# EAGLE board PCB-DISPARRAY4c (EAGLE 7.1.0)
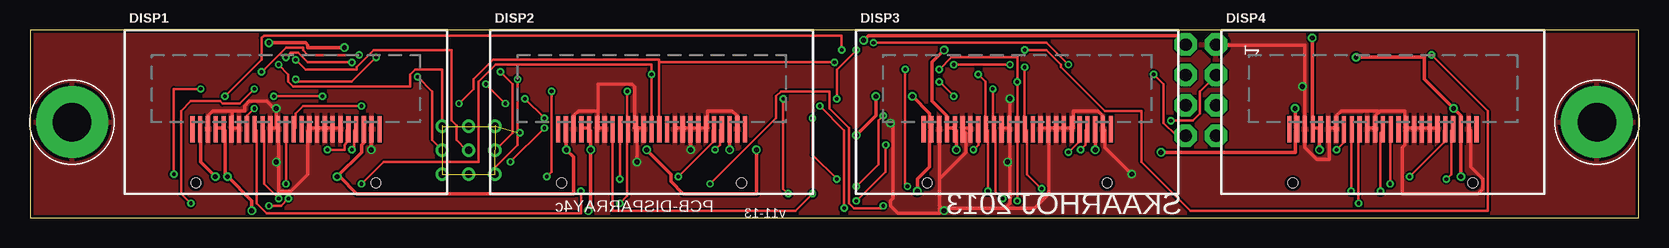
[diagram p0: board, top side]
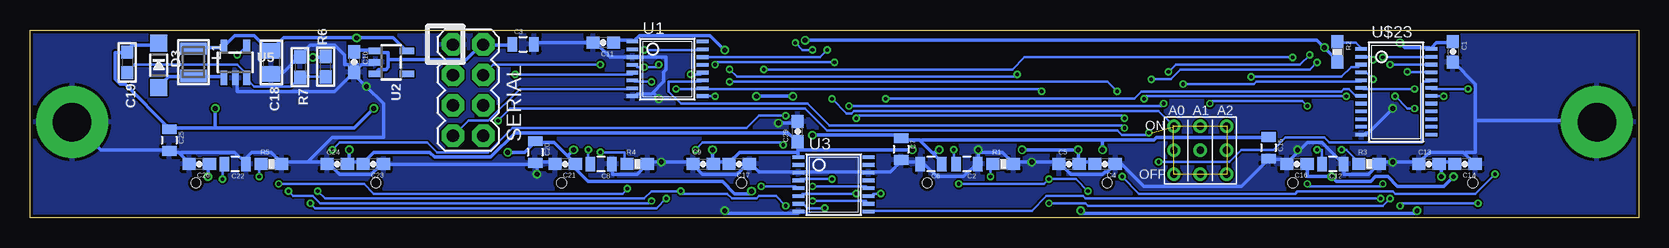
[diagram p1: board, bottom side, seen from below]

Size 134.11 x 15.7 mm. Coordinates in mm from the lower left corner, seen from the top.
Outline: 134.11,0 134.11,15.7 0,15.7 0,0 134.11,0
Copper layers (1*16): Top 0.035mm / dielectric 1.5mm / Bottom 0.035mm
Design rules "Fusion_eagle_rule_v1.1": minimum track width 6mil, minimum drill 12mil, track to track 6mil, track to pad 6mil, pad to pad 6mil, via to via 6mil, smd to smd 0mil, copper to edge 10mil, drill to drill 10mil, minimum pad ring 10mil, minimum via ring 6mil, stop-mask expansion 2mil, vias tented up to drill 100mil, thermal gap 10mil
Net classes: 0 default: width 0.203 mm, drill 0.305 mm, clearance 0.152 mm; 1 Power: width 0.305 mm, drill 0.406 mm, clearance 0.152 mm

## Footprints (pad centres in the part's own frame; a part is rotated, then mirrored left to right if it is on the bottom)
0603-CAP = smd 1.1 x 1: 1 -0.85,0; 2 0.85,0
0805 = smd 0.8 x 1.2: 1 -0.9,0; 2 0.9,0
0805' = smd 1.3 x 1.5: 1 -0.95,0; 2 0.95,0
0603 = smd 1.1 x 1: 1 -0.85,0; 2 0.85,0
SOD-123 = smd 1.4 x 1.4: A 1.85,0; C -1.85,0
ER_OLED0.91-2 = smd 0.35 x 2.2: 1 -7.8,-1.43; 2 -7.15,-1.43; 3 -6.5,-1.43; 4 -5.85,-1.43; 5 -5.2,-1.43; 6 -4.55,-1.43; 7 -3.9,-1.43; 8 -3.25,-1.43; 9 -2.6,-1.43; 10 -1.95,-1.43; 11 -1.3,-1.43; 12 -0.65,-1.43; 13 0,-1.43; 14 0.65,-1.43; 15 1.3,-1.43; 16 1.95,-1.43; 17 2.6,-1.43; 18 3.25,-1.43; 19 3.9,-1.43; 20 4.55,-1.43; 21 5.2,-1.43; 22 5.85,-1.43; 23 6.5,-1.43; 24 7.15,-1.43; 25 7.8,-1.43 | hole 0.8: -7.5,-5.93; 7.5,-5.93
INDUCTOR_1007 = smd 1.016 x 2.2: P$1 -1.127,0; P$2 1.127,0
0603-RES = smd 1.1 x 1: 1 -0.85,0; 2 0.85,0
2X4 = drill 1.016 pad 1.88 octagon: 1 -3.81,-1.27; 2 -3.81,1.27; 3 -1.27,-1.27; 4 -1.27,1.27; 5 1.27,-1.27; 6 1.27,1.27; 7 3.81,-1.27; 8 3.81,1.27
TSSOP16 = smd 0.305 x 0.991: 1 -3.575,-2.918; 2 -2.925,-2.918; 3 -2.275,-2.918; 4 -1.625,-2.918; 5 -0.975,-2.918; 6 -0.325,-2.918; 7 0.325,-2.918; 8 0.975,-2.918; 9 0.975,2.918; 10 0.325,2.918; 11 -0.325,2.918; 12 -0.975,2.918; 13 -1.625,2.918; 14 -2.275,2.918; 15 -2.925,2.918; 16 -3.575,2.918
SOT23-5 = smd 0.55 x 1.2: 1 -0.95,-1.3; 2 0,-1.3; 3 0.95,-1.3; 4 0.95,1.3; 5 -0.95,1.3
3.2MMPAD6MM = drill 3.2 pad 6: P$1 0,0
3BITADDR = drill 0.6: A0 -2.2,0; A1 0,0; A2 2.2,0; H1 -2.2,2; H2 0,2; H3 2.2,2; L1 -2.2,-2; L2 0,-2; L3 2.2,-2
TSSOP24 = smd 0.305 x 0.991: 1 -4.225,-2.918; 2 -3.575,-2.918; 3 -2.925,-2.918; 4 -2.275,-2.918; 5 -1.625,-2.918; 6 -0.975,-2.918; 7 -0.325,-2.918; 8 0.325,-2.918; 9 0.975,-2.918; 10 1.625,-2.918; 11 2.275,-2.918; 12 2.925,-2.918; 13 2.925,2.918; 14 2.275,2.918; 15 1.625,2.918; 16 0.975,2.918; 17 0.325,2.918; 18 -0.325,2.918; 19 -0.975,2.918; 20 -1.625,2.918; 21 -2.275,2.918; 22 -2.925,2.918; 23 -3.575,2.918; 24 -4.225,2.918

## Placement (x,y rotation side)
C1  0.1uF  [0603-CAP]  15.49,13.87 270 bottom
C2  4.7uF/25V  [0805]  56,4.5 180 bottom
C3  10uF  [0805]  93,14.5 0 bottom
C4  100nF  [0603-CAP]  44.5,4.5 180 bottom
C5  4.7uF  [0603-CAP]  47.5,4.5 0 bottom
C6  10uF  [0805]  59,4.5 180 bottom
C7  100nF  [0805]  61.5,5.75 270 bottom
C8  4.7uF/25V  [0805]  86.5,4.5 180 bottom
C9  100nF  [0603-CAP]  78,4.5 0 bottom
C10  2.2uF  [0603-CAP]  107.09,13.02 270 bottom
C11  0.1uF  [0603-CAP]  86.32,14.63 180 bottom
C12  4.7uF/25V  [0805]  25.5,4.5 180 bottom
C13  100nF  [0603-CAP]  17.5,4.5 0 bottom
C14  4.7uF  [0603-CAP]  14.5,4.5 180 bottom
C15  10uF  [0805]  30.87,5.87 270 bottom
C16  100nF  [0603-CAP]  28.5,4.5 180 bottom
C17  4.7uF  [0603-CAP]  75,4.5 180 bottom
C18  10uF  [0805']  114,13 270 bottom
C19  0.1uF  [0603]  126,13 270 bottom
C20  10uF  [0805]  92,5.5 270 bottom
C21  100nF  [0603-CAP]  89.5,4.5 180 bottom
C22  4.7uF/25V  [0805]  117,4.5 180 bottom
C23  100nF  [0603-CAP]  105.5,4.5 180 bottom
C24  4.7uF  [0603-CAP]  108.5,4.5 0 bottom
C25  10uF  [0805]  122.5,6.5 270 bottom
C26  100nF  [0603-CAP]  120,4.5 180 bottom
C29  0.1uF  [0603-CAP]  70.12,7.21 90 bottom
D3  BAT54T1G  [SOD-123]  123.37,12.75 270 bottom
DISP1  [ER_OLED0.91-2]  21.34,8.85 0 top
DISP2  [ER_OLED0.91-2]  51.82,8.85 0 top
DISP3  [ER_OLED0.91-2]  82.3,8.85 0 top
DISP4  [ER_OLED0.91-2]  112.78,8.85 0 top
L1  10uH  [INDUCTOR_1007]  120.5,13 270 bottom
R1  510K  [0603-RES]  53,4.5 0 bottom
R2  10K  [0603-RES]  25.13,13.88 270 bottom
R3  510K  [0603-RES]  22.5,4.5 0 bottom
R4  510K  [0603-RES]  83.5,4.5 0 bottom
R5  510K  [0603-RES]  114,4.5 0 bottom
R6  56K  [0603]  109.46,12.64 90 bottom
R7  10K  [0603]  111.61,12.59 270 bottom
SERIAL  M04X2  [2X4]  97.6,10.67 270 bottom
U1  74HC4050D  [TSSOP16]  80.98,11.16 270 bottom
U2  [SOT23-5]  104,13 270 bottom
U3  74HC4050D  [TSSOP16]  67.12,1.51 270 bottom
U5  FAN5331SX  [SOT23-5]  117,13 0 bottom
U$9  GNDPAD6MM  [3.2MMPAD6MM]  130.61,8 0 top
U$10  GNDPAD6MM  [3.2MMPAD6MM]  3.5,8 0 top
U$19  3BITADDR  [3BITADDR]  36.56,5.65 0 bottom
U$23  PCA9671  [TSSOP24]  20.23,9.88 270 bottom

## Library data of the parts
C1-C17 C20-C26 C29 R1-R5 SERIAL = SparkFun
C18 C19 D3 L1 R6 R7 U2 U5 = microbuilder
DISP1-DISP4 U1 U3 U$9 U$10 U$19 U$23 = SKAARHOJ

## Nets
3.3V [Power]: C4.2 C5.2 C9.2 C11.1 C13.2 C14.2 C17.2 C18.1 C23.2 C24.2 C29.1 DISP1.4 DISP1.5 DISP2.4 DISP2.5 DISP3.4 DISP3.5 DISP4.4 DISP4.5 L1.P$1 U1.1 U2.5 U3.1 U5.5
5V [Power]: C1.1 C3.1 C10.1 R2.2 SERIAL.2 U2.1 U2.3 U$23.24
7.5V [Power]: C6.1 C7.1 C15.1 C16.1 C19.1 C20.1 C21.1 C25.1 C26.1 D3.C DISP1.2 DISP1.23 DISP2.2 DISP2.23 DISP3.2 DISP3.23 DISP4.2 DISP4.23 R6.2
A0: U$19.A0 U$23.21
A1: U$19.A1 U$23.2
A2: U$19.A2 U$23.3
CS_DISP1: DISP1.8 U3.4
CS_DISP2: DISP2.8 U3.6
CS_DISP3: DISP3.8 U3.10
CS_DISP4: DISP4.8 U3.12
DC_3V3: DISP1.10 DISP2.10 DISP3.10 DISP4.10 U1.10
DC_5V: U1.9 U$23.19
DPWR_3V3: U1.15 U5.4
DPWR_5V: U1.14 U$23.18
GND [Power]: C1.2 C2.1 C3.2 C4.1 C5.1 C6.2 C7.2 C8.1 C9.1 C10.2 C11.2 C12.1 C13.1 C14.1 C15.2 C16.2 C17.1 C18.2 C20.2 C21.2 C22.1 C23.1 C24.1 C25.2 C26.2 C29.2 DISP1.3 DISP1.6 DISP1.7 DISP1.11 DISP1.12 DISP1.16 DISP1.17 DISP1.18 DISP1.19 DISP1.20 DISP1.24 DISP2.3 DISP2.6 DISP2.7 DISP2.11 DISP2.12 DISP2.16 DISP2.17 DISP2.18 DISP2.19 DISP2.20 DISP2.24 DISP3.3 DISP3.6 DISP3.7 DISP3.11 DISP3.12 DISP3.16 DISP3.17 DISP3.18 DISP3.19 DISP3.20 DISP3.24 DISP4.3 DISP4.6 DISP4.7 DISP4.11 DISP4.12 DISP4.16 DISP4.17 DISP4.18 DISP4.19 DISP4.20 DISP4.24 R1.2 R3.2 R4.2 R5.2 R7.1 SERIAL.1 U1.3 U1.8 U2.2 U3.3 U3.8 U3.14 U5.2 U$9.P$1 U$10.P$1 U$23.12
I2C_SCL: SERIAL.4 U$19.L1 U$19.L2 U$19.L3 U$23.22
I2C_SDA: SERIAL.3 U$19.H1 U$19.H2 U$19.H3 U$23.23
N$1: R2.1 U$23.1
N$2: DISP2.21 R1.1
N$3: C2.2 DISP2.22
N$4: DISP3.21 R4.1
N$5: DISP1.21 R3.1
N$6: C8.2 DISP3.22
N$7: DISP4.21 R5.1
N$8: C22.2 DISP4.22
N$10: C12.2 DISP1.22
N$14 [Power]: D3.A L1.P$2 U5.1
N$15: C19.2 R6.1 R7.2 U5.3
N$29: U3.5 U$23.4
N$30: U3.7 U$23.5
N$31: U3.9 U$23.6
N$32: U3.11 U$23.7
RES_3V3: DISP1.9 DISP2.9 DISP3.9 DISP4.9 U1.12
RES_5V: U1.11 U$23.20
SCLK_3V3: DISP1.13 DISP2.13 DISP3.13 DISP4.13 U1.6
SDIN_3V3: DISP1.14 DISP2.14 DISP3.14 DISP4.14 U1.4
SPI_MOSI: SERIAL.8 U1.5
SPI_SCLK: SERIAL.7 U1.7

## Tracks (layer width: path | path; a pad name or v marks a point on that pad's centre or on a via)
3.3V  (via drill 0.41)
  Top 0.305: v107.49,5.69 107.49,7.32 DISP4.5 107.49,7.52 107.09,7.52 DISP4.4 106.88,7.52 v106.88,15.04 | v76.2,14.02 75.18,13.01 75.18,9.75 76.4,8.53 76.4,7.52 DISP3.4 76.61,7.52 77.01,7.52 DISP3.5 77.22,7.32 v77.22,5.69 | DISP1.4 15.65,7.52 16.05,7.52 DISP1.5 16.26,7.32 16.26,3.66 v16.46,3.45 18.49,1.42 v18.49,0.61 | DISP2.4 46.13,7.52 46.53,7.52 DISP2.5 46.74,7.32 v46.74,5.69 46.74,0.81 v46.53,0.61 | v51.41,5.69 53.44,3.66 53.44,3.05 54.46,2.03 60.55,2.03 v60.55,5.69
  Bottom 0.305: 107.49,4.67 106.48,4.67 C23.2 106.27,4.67 105.46,5.49 100.79,5.49 100.38,5.08 95.71,5.08 93.67,7.11 70.92,7.11 70.31,6.5 C29.1 70.1,6.3 70.1,5.69 | v107.49,5.69 107.49,4.67 | 107.49,4.67 C24.2 | L1.P$1 120.5,14.22 118.06,14.22 U5.5 117.86,14.43 117.04,15.24 115.42,15.24 114.2,14.02 C18.1 114,14.02 112.98,15.04 v106.88,15.04 103.83,15.04 102.82,14.02 U2.5 | C11.1 85.34,14.83 83.92,14.83 U1.1 83.72,14.83 83.31,15.24 77.42,15.24 v76.2,14.02 | C14.2 15.44,4.67 16.46,4.67 C13.2 16.46,4.47 v16.46,3.45 | C4.2 45.52,4.67 46.53,4.67 C5.2 46.74,4.67 v46.74,5.69 v51.41,5.69 | 70.1,5.69 70.1,5.49 | 70.1,5.49 70.1,5.08 U3.1 | 70.1,5.49 74.98,5.49 75.79,4.67 C17.2 76,4.67 77.01,4.67 C9.2 77.22,4.67 v77.22,5.69 | 70.1,5.69 v60.55,5.69 | v18.49,0.61 18.69,0.41 46.33,0.41 v46.53,0.61
5V  (via drill 0.41)
  Top 0.305: v26.21,14.22 23.16,14.22 23.16,14.43 22.96,14.63 v19.91,14.63 | v69.49,14.83 69.9,15.24 96.32,15.24 96.32,14.63 SERIAL.2
  Bottom 0.305: C1.1 15.65,14.63 16.87,14.63 17.27,14.22 U$23.24 17.48,14.22 19.51,14.22 v19.91,14.63 | R2.2 25.2,13.21 v26.21,14.22 26.82,14.83 v69.49,14.83 | C10.1 107.09,14.02 105.46,14.02 U2.1 105.26,13.82 104.24,13.82 104.24,13.21 | 104.24,13.21 104.24,12.6 104.44,12.39 105.05,12.39 105.26,12.19 U2.3 | C3.1 94.08,14.43 96.32,14.43 SERIAL.2 96.52,14.43 97.74,13.21 104.24,13.21
7.5V  (via drill 0.41)
  Top 0.305: v15.44,3.45 14.22,4.67 14.22,7.32 DISP1.2 | 27.84,7.52 DISP1.23 27.84,7.32 27.84,6.3 27.64,6.1 27.64,5.49 v25.6,3.45 25.81,3.45 27.23,2.03 45.31,2.03 45.31,5.08 v44.7,5.69 44.7,7.32 DISP2.2 44.7,7.52 | 58.32,7.52 DISP2.23 58.32,7.32 v58.32,5.69 | 88.8,7.52 DISP3.23 88.8,7.32 v88.8,5.69 | 75.18,7.52 DISP3.2 | v73.97,2.23 73.97,3.25 74.98,4.27 74.98,7.32 DISP3.2 | v110.54,13.41 116.23,13.41 116.23,11.58 v118.67,9.14 119.28,8.53 119.28,7.52 DISP4.23 119.28,7.32 v119.28,3.45 | 105.66,7.52 DISP4.2 | v105.46,9.14 105.46,7.52 DISP4.2 | v94.28,5.49 105.46,5.49 105.46,7.32 DISP4.2 | v68.89,6.91 70.51,8.53 v70.51,10.16 | v73.56,10.16 74.98,8.74 74.98,7.52 DISP3.2
  Bottom 0.305: C16.1 27.64,4.47 27.64,3.45 v25.6,3.45 25.2,3.05 22.35,3.05 21.95,3.45 20.93,3.45 20.12,2.64 16.26,2.64 v15.44,3.45 | 59.84,6.4 59.94,6.5 61.37,6.5 C7.1 61.57,6.71 61.77,6.91 v68.89,6.91 | 59.84,6.4 58.83,5.38 | 58.83,5.38 58.12,4.67 C6.1 | 44.7,6.5 59.74,6.5 59.84,6.4 | 44.7,6.5 40.44,6.5 40.23,6.71 30.89,6.71 C15.1 | 44.7,6.5 v44.7,5.69 | v58.32,5.69 58.52,5.49 58.73,5.49 58.83,5.38 | 89.31,5.18 90.42,6.3 91.85,6.3 C20.1 92.05,6.3 92.86,5.49 v94.28,5.49 | 89.31,5.18 88.8,4.67 C21.1 88.59,4.47 88.59,4.06 87.58,3.05 76.4,3.05 75.39,2.03 74.17,2.03 v73.97,2.23 | 89.31,5.18 v88.8,5.69 | v110.54,13.41 109.53,13.41 R6.2 | v119.28,3.45 119.28,4.47 C26.1 | D3.C 123.55,14.43 125.58,14.43 125.98,14.02 C19.1 126.19,13.82 127,13.82 127,11.58 126.59,11.18 126.19,11.18 122.53,7.52 C25.1 122.33,7.52 118.67,7.52 | v105.46,9.14 107.09,7.52 118.67,7.52 | 118.67,7.52 v118.67,9.14 | v73.56,10.16 v70.51,10.16
A0  (via drill 0.3)
  Top 0.203: v19.3,12.19 21.34,14.22 22.76,14.22 22.76,14.02 23.16,13.61 v27.43,13.61 | v39.22,12.19 40.23,11.18 40.23,7.11 38.81,5.69 U$19.A0
  Bottom 0.203: v19.3,12.19 17.48,12.19 U$23.21 | v27.43,13.61 28.25,12.8 38.61,12.8 v39.22,12.19
A1  (via drill 0.3)
  Top 0.203: v22.15,13.21 22.96,12.39 27.23,12.39 27.23,12.6 28.65,14.02 35.15,14.02 35.15,8.13 35.56,7.72 35.56,6.5 36.37,5.69 U$19.A1
  Bottom 0.203: v22.15,13.21 22.35,13.41 22.96,13.41 U$23.2
A2  (via drill 0.3)
  Top 0.203: v32.31,11.79 33.53,10.57 33.53,6.5 34.34,5.69 U$19.A2
  Bottom 0.203: v32.31,11.79 24.79,11.79 23.98,12.6 23.37,12.6 23.16,12.8 U$23.3
CS_DISP1  (via drill 0.3)
  Top 0.203: v67.26,3.25 65.23,5.28 v65.23,8.33 | v41.25,9.96 v42.88,8.33 | v20.32,10.16 v24.38,10.16 | v18.69,9.14 18.09,8.53 18.09,7.52 DISP1.8
  Bottom 0.203: v67.26,3.25 69.9,3.25 U3.4 | v65.23,8.33 65.02,8.53 43.08,8.53 v42.88,8.33 | v41.25,9.96 41.05,10.16 v24.38,10.16 | v20.32,10.16 19.3,9.14 v18.69,9.14
CS_DISP2  (via drill 0.3)
  Top 0.203: v65.23,2.03 63.8,0.61 48.56,0.61 48.56,7.32 DISP2.8
  Bottom 0.203: v65.23,2.03 69.7,2.03 69.9,1.83 U3.6
CS_DISP3  (via drill 0.3)
  Top 0.203: v68.89,1.42 71.32,3.86 v71.32,6.1 | v78.64,5.69 79.05,6.1 79.05,7.32 DISP3.8
  Bottom 0.203: v68.89,1.42 64.41,1.42 64.21,1.22 U3.10 | v71.32,6.1 71.53,6.3 78.03,6.3 v78.64,5.69
CS_DISP4  (via drill 0.3)
  Top 0.203: v68.89,2.64 70.71,4.47 70.71,8.13 v71.12,8.53 | v108.92,5.69 109.53,6.3 109.53,7.32 DISP4.8
  Bottom 0.203: v68.89,2.64 64.41,2.64 64.21,2.44 U3.12 | v71.12,8.53 73.36,8.53 74.37,7.52 93.88,7.52 95.91,5.49 100.18,5.49 100.99,6.3 108.31,6.3 v108.92,5.69
DC_3V3  (via drill 0.3)
  Top 0.203: v20.73,1.63 19.51,2.85 19.51,7.32 DISP1.10 | v49.17,1.22 49.78,1.83 49.78,7.32 DISP2.10 49.78,7.52 v49.78,10.57 | v80.26,10.77 80.26,7.52 DISP3.10 80.47,7.32 80.47,2.23 v81.08,1.63 | v110.74,1.22 110.74,7.32 DISP4.10
  Bottom 0.203: v20.73,1.63 21.34,1.02 45.92,1.02 46.13,1.22 v49.17,1.22 | v80.26,10.77 78.23,10.77 U1.10 78.03,10.77 49.99,10.77 v49.78,10.57 | v110.74,1.22 110.34,0.81 81.89,0.81 v81.08,1.63
DC_5V  (via drill 0.3)
  Top 0.203: v14.22,10.77 11.99,10.77 v11.99,3.66 | v43.08,3.45 43.48,3.86 v43.48,10.57 | v77.01,10.16 v75.79,11.38
  Bottom 0.203: v14.22,10.77 17.27,10.77 U$23.19 | v11.99,3.66 13.61,2.03 20.32,2.03 20.52,2.23 28.45,2.23 28.65,2.03 41.66,2.03 v43.08,3.45 | v43.48,10.57 44.3,11.38 v75.79,11.38 | v77.01,10.16 78.03,10.16 U1.9
DPWR_3V3  (via drill 0.3)
  Top 0.203: v82.91,14.02 84.73,14.02 85.95,12.8 85.95,12.6 89.61,8.94 92.66,8.94 92.66,4.67 96.72,0.61 121.51,0.61 121.51,8.94 v116.84,13.61
  Bottom 0.203: v82.91,14.02 78.23,14.02 U1.15 | v116.84,13.61 116.23,14.22 U5.4
DPWR_5V  (via drill 0.3)
  Top 0.203: v16.26,10.16 19.3,13.21 19.3,15.04 19.51,15.24 67.67,15.24 v67.67,14.02
  Bottom 0.203: v16.26,10.16 17.27,10.16 U$23.18 | v67.67,14.02 68.28,13.41 78.03,13.41 U1.14
GND  (via drill 0.41)
  Top 0.305: DISP4.20 117.25,7.52 116.84,7.52 DISP4.19 116.64,7.52 116.03,7.52 | DISP4.11 111.56,7.52 111.96,7.52 DISP4.12 112.17,7.52 112.17,8.53 112.47,8.84 | DISP4.16 114.81,7.52 115.21,7.52 DISP4.17 115.42,7.52 116.03,7.52 | DISP4.24 120.09,7.32 120.09,4.27 121.11,3.25 121.11,2.44 120.7,2.03 114.4,2.03 114.4,5.89 114.61,6.1 114.61,7.32 DISP4.16 | 112.47,8.84 112.57,8.94 114.61,8.94 114.61,7.52 DISP4.16 | 116.03,7.52 DISP4.18 | 112.47,8.84 112.37,8.94 109.32,8.94 108.92,8.53 108.92,7.52 DISP4.7 108.71,7.52 108.31,7.52 DISP4.6 108.31,7.32 108.31,4.88 107.29,4.88 106.27,5.89 106.27,7.32 DISP4.3 106.27,7.52 106.27,10.97 | 106.27,10.97 106.27,14.43 98.96,14.43 SERIAL.1 | v106.07,10.97 106.27,10.97 | 16.87,8.94 15.24,8.94 14.83,8.53 14.83,7.52 DISP1.3 | 16.87,7.52 16.87,8.94 | 16.87,7.52 17.27,7.52 DISP1.7 | 16.87,7.52 DISP1.6 | DISP1.20 25.81,7.52 25.4,7.52 DISP1.19 25.2,7.52 24.59,7.52 | 24.59,7.52 23.98,7.52 DISP1.17 23.77,7.52 23.37,7.52 DISP1.16 23.16,7.32 23.16,3.66 21.74,2.23 20.73,2.23 20.73,4.67 | 24.59,7.52 DISP1.18 | 20.52,7.52 20.52,8.94 | 20.52,7.52 20.12,7.52 DISP1.11 | 20.52,7.52 DISP1.12 20.73,7.32 20.73,4.67 | 16.87,8.94 17.88,8.94 17.88,9.35 18.29,9.75 19.71,9.75 20.52,8.94 | 20.52,8.94 v20.52,9.14 | v28.45,5.69 28.45,7.32 DISP1.24 | v20.52,4.67 20.73,4.67 | DISP3.16 84.33,7.52 84.73,7.52 DISP3.17 | 85.55,7.52 84.94,7.52 DISP3.17 | 85.55,7.52 86.16,7.52 DISP3.19 86.36,7.52 86.77,7.52 DISP3.20 86.97,7.52 86.97,8.94 89,8.94 89.41,8.53 89.41,7.52 DISP3.24 89.61,7.32 89.61,5.89 v91.85,3.66 | 85.55,7.52 DISP3.18 | DISP3.11 81.08,7.52 81.48,7.52 DISP3.12 | DISP3.7 78.23,7.52 77.83,7.52 DISP3.6 77.83,7.32 78.03,7.11 78.03,5.49 75.79,3.25
  Top 0.305: 75.89,0.91 75.79,1.02 75.79,3.25 | 75.89,0.91 v76.2,0.61 76.2,0.81 81.28,0.81 81.38,0.91 | 75.79,3.25 75.79,7.32 DISP3.3 | v71.73,7.92 71.93,7.72 71.93,1.63 71.73,1.42 71.73,1.02 72.34,0.41 75.79,0.41 75.79,0.81 75.89,0.91 | 81.69,4.67 81.69,1.22 81.38,0.91 | 81.69,4.67 81.69,7.32 DISP3.12 | DISP3.17 84.94,7.32 84.94,2.03 83.72,0.81 81.48,0.81 81.38,0.91 | v81.69,9.96 81.69,7.52 DISP3.12 | DISP2.11 50.6,7.52 51,7.52 DISP2.12 | 47.35,8.94 45.72,8.94 45.31,8.53 45.31,7.52 DISP2.3 | 47.35,7.52 47.35,8.94 | 47.35,7.52 47.75,7.52 DISP2.7 | 47.35,7.52 DISP2.6 | 47.35,8.94 47.35,11.18 50.19,11.18 50.39,10.97 50.39,7.52 DISP2.11 | DISP2.16 53.85,7.52 54.25,7.52 DISP2.17 54.46,7.52 55.07,7.52 | DISP2.24 58.93,7.52 58.93,8.53 58.52,8.94 56.49,8.94 56.49,7.52 DISP2.20 56.29,7.52 55.88,7.52 DISP2.19 55.68,7.52 55.07,7.52 | 55.07,7.52 DISP2.18 55.07,7.32 v55.07,5.69 | v50.6,4.67 50.6,7.32 DISP2.11 | v81.48,4.67 81.69,4.67
  Bottom 0.305: C18.2 114,12.19 112.98,12.19 111.76,13.41 R7.1 111.56,13.61 110.74,14.43 108.71,14.43 107.9,13.61 107.9,12.8 106.68,12.8 106.58,12.7 | 106.58,12.7 106.48,12.8 105.46,12.8 U2.2 | 106.58,12.7 107.09,12.19 C10.2 | U5.2 116.84,11.58 116.84,10.57 108.71,10.57 107.29,11.99 C10.2 | 121.61,5.38 121.72,5.49 122.33,5.49 C25.2 122.53,5.69 128.22,5.69 130.45,7.92 U$9.P$1 | 121.61,5.38 120.9,4.67 C26.2 | 121.61,5.38 121.51,5.49 117.04,5.49 116.23,4.67 C22.1 116.23,4.88 115.62,5.49 114,5.49 113.18,4.67 R5.2 112.98,4.67 110.95,4.67 | C21.2 90.42,4.67 91.85,4.67 C20.2 | 110.95,4.67 109.53,4.67 C24.1 109.32,4.47 109.12,4.47 108.31,3.66 105.66,3.66 104.85,4.47 C23.1 104.65,4.47 92.05,4.47 C20.2 | 110.95,4.67 108.92,6.71 104.65,6.71 104.65,9.55 v106.07,10.97 107.09,11.99 C10.2 | v20.52,9.14 22.55,7.11 22.76,7.11 22.96,6.91 U$23.12 | 14.53,5.38 14.63,5.49 17.48,5.49 18.29,4.67 C13.1 18.49,4.67 v20.52,4.67 21.54,4.67 R3.2 21.74,4.47 22.55,3.66 24.59,3.66 24.59,4.47 C12.1 24.79,4.67 26.42,6.3 27.64,6.3 28.35,5.59 | 14.53,5.38 13.82,4.67 C14.1 | 13.61,8.13 13.61,5.49 14.43,5.49 14.53,5.38 | 13.61,8.13 13.61,11.18 15.44,13.01 C1.2 | 28.35,5.59 29.26,4.67 C16.2 29.46,4.67 29.67,4.88 30.68,4.88 C15.2 30.89,4.88 33.12,2.64 41.25,2.64 43.08,4.47 43.48,4.47 C4.1 43.69,4.47 44.3,3.86 44.5,3.86 44.7,3.66 47.35,3.66 48.16,4.47 C5.1 48.36,4.67 v50.6,4.67 52.02,4.67 R1.2 52.22,4.67 53.03,5.49 55.07,5.49 | v28.45,5.69 28.35,5.59 | 13.61,8.13 3.66,8.13 U$10.P$1 | 82.19,10.46 81.28,11.38 81.28,12.19 81.08,12.39 81.08,13.41 83.72,13.41 U1.3 83.92,13.41 85.75,13.41 86.97,14.63 C11.2 92.05,14.63 C3.2
  Bottom 0.305: 82.19,10.46 82.3,10.36 83.52,10.36 83.72,10.16 U1.8 | v76.2,0.61 76,0.41 70.1,0.41 U3.8 | v71.73,7.92 70.31,7.92 C29.2 | v81.69,9.96 82.19,10.46 | 55.07,5.49 55.07,4.67 C2.1 55.27,4.47 56.29,3.45 58.52,3.45 59.54,4.47 59.74,4.47 C6.2 59.94,4.67 61.37,4.67 C7.2 61.57,4.67 62.38,3.86 64.01,3.86 U3.14 64.21,3.86 69.9,3.86 U3.3 70.1,3.86 73.36,3.86 73.97,4.47 C17.1 74.17,4.47 74.37,4.47 75.18,3.66 78.03,3.66 78.84,4.47 C9.1 79.05,4.67 v81.48,4.67 82.5,4.67 R4.2 82.7,4.47 83.52,3.66 85.55,3.66 85.55,4.47 C8.1 | 55.07,5.49 v55.07,5.69 | v91.85,3.66 91.85,4.47 C20.2
  pour Top: 0,0 134,0 134,16 0,16
  pour Bottom: 0,0 134,0 134,16 0,16
I2C_SCL  (via drill 0.3)  (4 unrouted)
  Top 0.203: v20.73,12.8 21.54,11.99 21.54,11.38 21.95,10.97 31.7,10.97 31.7,11.99 32.11,12.39 34.34,12.39 34.34,7.72 | v86.56,12.8 84.73,14.63 v70.31,14.63 | v68.89,14.02 67.26,12.39 v67.26,9.96
  Bottom 0.203: v20.73,12.8 17.48,12.8 U$23.22 | v86.56,12.8 95.5,12.8 96.32,11.99 SERIAL.4 | v70.31,14.63 69.7,14.02 v68.89,14.02 | v67.26,9.96 66.04,8.74 65.63,8.74 65.43,8.94 40.03,8.94 38.81,7.72
I2C_SDA  (via drill 0.3)  (3 unrouted)
  Top 0.203: v21.34,13.41 21.74,13.82 22.35,13.82 23.16,13.01 v26.82,13.01 | 40.64,7.11 40.64,6.1 38.81,4.27 38.81,3.66 | 40.64,7.11 v40.64,11.58 | v95.1,8.13 96.93,8.13 97.54,8.74 97.54,10.57 98.75,11.79 SERIAL.3 | 40.64,7.11 v40.84,7.11
  Bottom 0.203: v21.34,13.41 17.48,13.41 U$23.23 | v26.82,13.01 27.43,12.39 38.2,12.39 39.01,11.58 v40.64,11.58 | v95.1,8.13 94.08,9.14 69.49,9.14 67.67,7.32 43.48,7.32 43.08,6.91 41.05,6.91 v40.84,7.11
N$1
  Bottom 0.203: U$23.1 23.16,14.22 23.57,14.63 24.99,14.63 R2.1
N$2  (via drill 0.3)
  Top 0.203: v54.05,3.45 56.9,6.3 56.9,7.32 DISP2.21
  Bottom 0.203: v54.05,3.45 54.05,4.47 R1.1
N$3  (via drill 0.3)
  Top 0.203: v57.1,5.69 57.51,6.1 57.51,7.32 DISP2.22
  Bottom 0.203: v57.1,5.69 57.1,4.67 C2.2
N$4  (via drill 0.3)
  Top 0.203: v86.56,5.49 87.38,6.3 87.38,7.32 DISP3.21
  Bottom 0.203: v86.56,5.49 84.53,5.49 84.53,4.67 R4.1
N$5  (via drill 0.3)
  Top 0.203: v24.79,5.69 26.21,5.69 26.21,6.1 26.42,6.3 26.42,7.32 DISP1.21
  Bottom 0.203: v24.79,5.69 24.38,5.69 23.37,4.67 R3.1
N$6  (via drill 0.3)
  Top 0.203: v87.58,5.69 87.99,6.1 87.99,7.32 DISP3.22
  Bottom 0.203: v87.58,5.69 87.58,4.67 C8.2
N$7  (via drill 0.3)
  Top 0.203: v115.01,3.45 117.86,6.3 117.86,7.32 DISP4.21
  Bottom 0.203: v115.01,3.45 115.01,4.47 R5.1
N$8  (via drill 0.3)
  Top 0.203: v118.06,3.25 118.47,3.66 118.47,7.32 DISP4.22
  Bottom 0.203: v118.06,3.25 118.06,4.47 C22.2
N$10  (via drill 0.3)
  Top 0.203: v26.82,5.69 27.03,5.89 27.03,7.32 DISP1.22
  Bottom 0.203: v26.82,5.69 26.42,5.69 26.42,4.67 C12.2
N$14
  Bottom 0.305: U5.1 118.06,11.79 120.5,11.79 L1.P$2 120.7,11.79 122.53,11.79 123.34,10.97 D3.A
N$15
  Bottom 0.203: R6.1 109.53,11.79 111.56,11.79 R7.2 111.76,11.58 112.37,10.97 115.42,10.97 116.03,11.58 U5.3 116.23,11.79 116.23,12.19 116.84,12.8 125.37,12.8 125.98,12.19 C19.2
N$29  (via drill 0.3)
  Top 0.203: v73.15,2.64 72.95,2.85 v72.95,12.39 | v28.85,13.41 26.82,11.38 22.15,11.38 v22.15,11.58
  Bottom 0.203: v73.15,2.64 70.31,2.64 70.1,2.44 U3.5 | v72.95,12.39 52.22,12.39 51.21,13.41 v28.85,13.41 | v22.15,11.58 22.76,12.19 22.96,12.19 U$23.4
N$30  (via drill 0.3)
  Top 0.203: v39.62,9.55 v38,11.18 | v65.84,9.35 67.87,7.32 v67.87,0.81
  Bottom 0.203: v38,11.18 32.11,11.18 31.9,11.38 23.16,11.38 U$23.5 | v39.62,9.55 39.83,9.35 v65.84,9.35 | v67.87,0.81 69.29,0.81 69.7,1.22 69.9,1.22 U3.7
N$31  (via drill 0.3)
  Top 0.203: v21.54,1.63 20.93,1.02 v19.91,1.02 | v13.41,1.22 12.6,2.03 12.6,8.94 13.41,9.75 15.85,9.75 16.05,9.55 17.48,9.55 v18.69,10.77
  Bottom 0.203: v21.54,1.63 46.13,1.63 46.33,1.83 49.38,1.83 50.6,0.61 64.01,0.61 U3.9 | v19.91,1.02 19.71,1.22 v13.41,1.22 | v18.69,10.77 22.96,10.77 U$23.6
N$32  (via drill 0.3)
  Top 0.203: v63.2,2.03 62.79,2.44 v62.79,9.96
  Bottom 0.203: v63.2,2.03 63.8,2.03 64.01,1.83 U3.11 | v62.79,9.96 42.06,9.96 41.45,10.57 24.79,10.57 24.59,10.77 24.18,10.77 23.57,10.16 23.16,10.16 U$23.7
RES_3V3  (via drill 0.3)
  Top 0.203: v45.92,2.23 45.92,0.41 19.71,0.41 18.9,1.22 18.9,7.32 DISP1.9 | v49.17,3.25 49.17,7.32 DISP2.9 | v79.05,11.99 79.65,11.38 79.65,7.52 DISP3.9 79.86,7.32 v79.86,2.23 | v110.13,2.23 110.13,7.32 DISP4.9 | v56.69,2.85 62.18,8.33 62.18,10.16 62.59,10.57 66.65,10.57 66.65,9.14 68.28,7.52 68.28,1.22 68.68,0.81 71.12,0.81 v71.12,1.02
  Bottom 0.203: v45.92,2.23 46.94,3.25 v49.17,3.25 49.58,2.85 v56.69,2.85 | v79.05,11.99 78.23,11.99 U1.12 | v110.13,2.23 109.53,1.63 82.91,1.63 82.3,2.23 v79.86,2.23 79.65,2.03 76,2.03 75.59,1.63 73.56,1.63 73.36,1.83 71.93,1.83 v71.12,1.02
RES_5V  (via drill 0.3)
  Top 0.203: v42.88,7.52 v40.03,4.67
  Bottom 0.203: v40.03,4.67 34.14,4.67 33.12,5.69 30.48,5.69 29.46,6.71 26.21,6.71 25.81,6.3 18.09,6.3 18.09,11.18 17.88,11.38 17.48,11.38 U$23.20 | v42.88,7.52 43.08,7.72 67.46,7.72 69.29,9.55 79.86,9.55 80.87,10.57 80.87,11.38 78.23,11.38 U1.11
SCLK_3V3  (via drill 0.3)
  Top 0.203: v21.34,2.85 DISP1.13 | v27.64,2.85 29.46,4.67 37.39,4.67 37.39,11.38 38.81,12.8 51.82,12.8 v51.82,11.99 DISP2.13 | v112.57,2.23 112.57,7.11 112.78,7.32 DISP4.13 | v82.3,1.42 DISP3.13 v82.3,11.38 82.3,13.41 76.81,13.41 v75.79,12.39
  Bottom 0.203: v21.34,2.85 21.54,2.64 27.43,2.64 v27.64,2.85 | v82.3,11.38 83.72,11.38 U1.6 | v112.57,2.23 112.17,1.83 110.54,1.83 109.93,1.22 82.5,1.22 v82.3,1.42 | v51.82,11.99 52.02,11.79 75.18,11.79 v75.79,12.39
SDIN_3V3  (via drill 0.3)
  Top 0.203: v27.64,9.35 22.76,9.35 22.15,8.74 22.15,7.52 DISP1.14 | v35.76,9.55 36.98,10.77 36.98,11.58 38.61,13.21 52.43,13.21 52.43,13.01 | 52.43,13.01 52.43,7.52 DISP2.14 | v82.91,12.6 82.91,7.52 DISP3.14 83.11,7.32 83.11,3.66 v84.33,2.44 | v113.39,2.85 113.39,7.32 DISP4.14 | v67.06,13.01 52.43,13.01 | v81.69,12.8 v77.01,12.8
  Bottom 0.203: v27.64,9.35 28.04,9.75 35.56,9.75 v35.76,9.55 | U1.4 83.72,12.8 83.52,12.6 v82.91,12.6 81.89,12.6 v81.69,12.8 | v113.39,2.85 106.27,2.85 105.46,2.03 84.73,2.03 v84.33,2.44 | v67.06,13.01 76.81,13.01 v77.01,12.8
SPI_MOSI  (via drill 0.3)
  Top 0.203: v93.67,11.99 94.49,11.18 94.49,7.92 95.5,6.91 96.32,6.91 SERIAL.8
  Bottom 0.203: v93.67,11.99 83.92,11.99 U1.5
SPI_SCLK
  Bottom 0.203: U1.7 83.92,10.77 93.27,10.77 95.91,8.13 97.54,8.13 98.75,6.91 SERIAL.7

## Text on the board
_tsilk: 1 | PCB-DISPARRAY4c | v11-13 | SKAARHOJ 2013